# Allegro board TRS80_POWER.brd
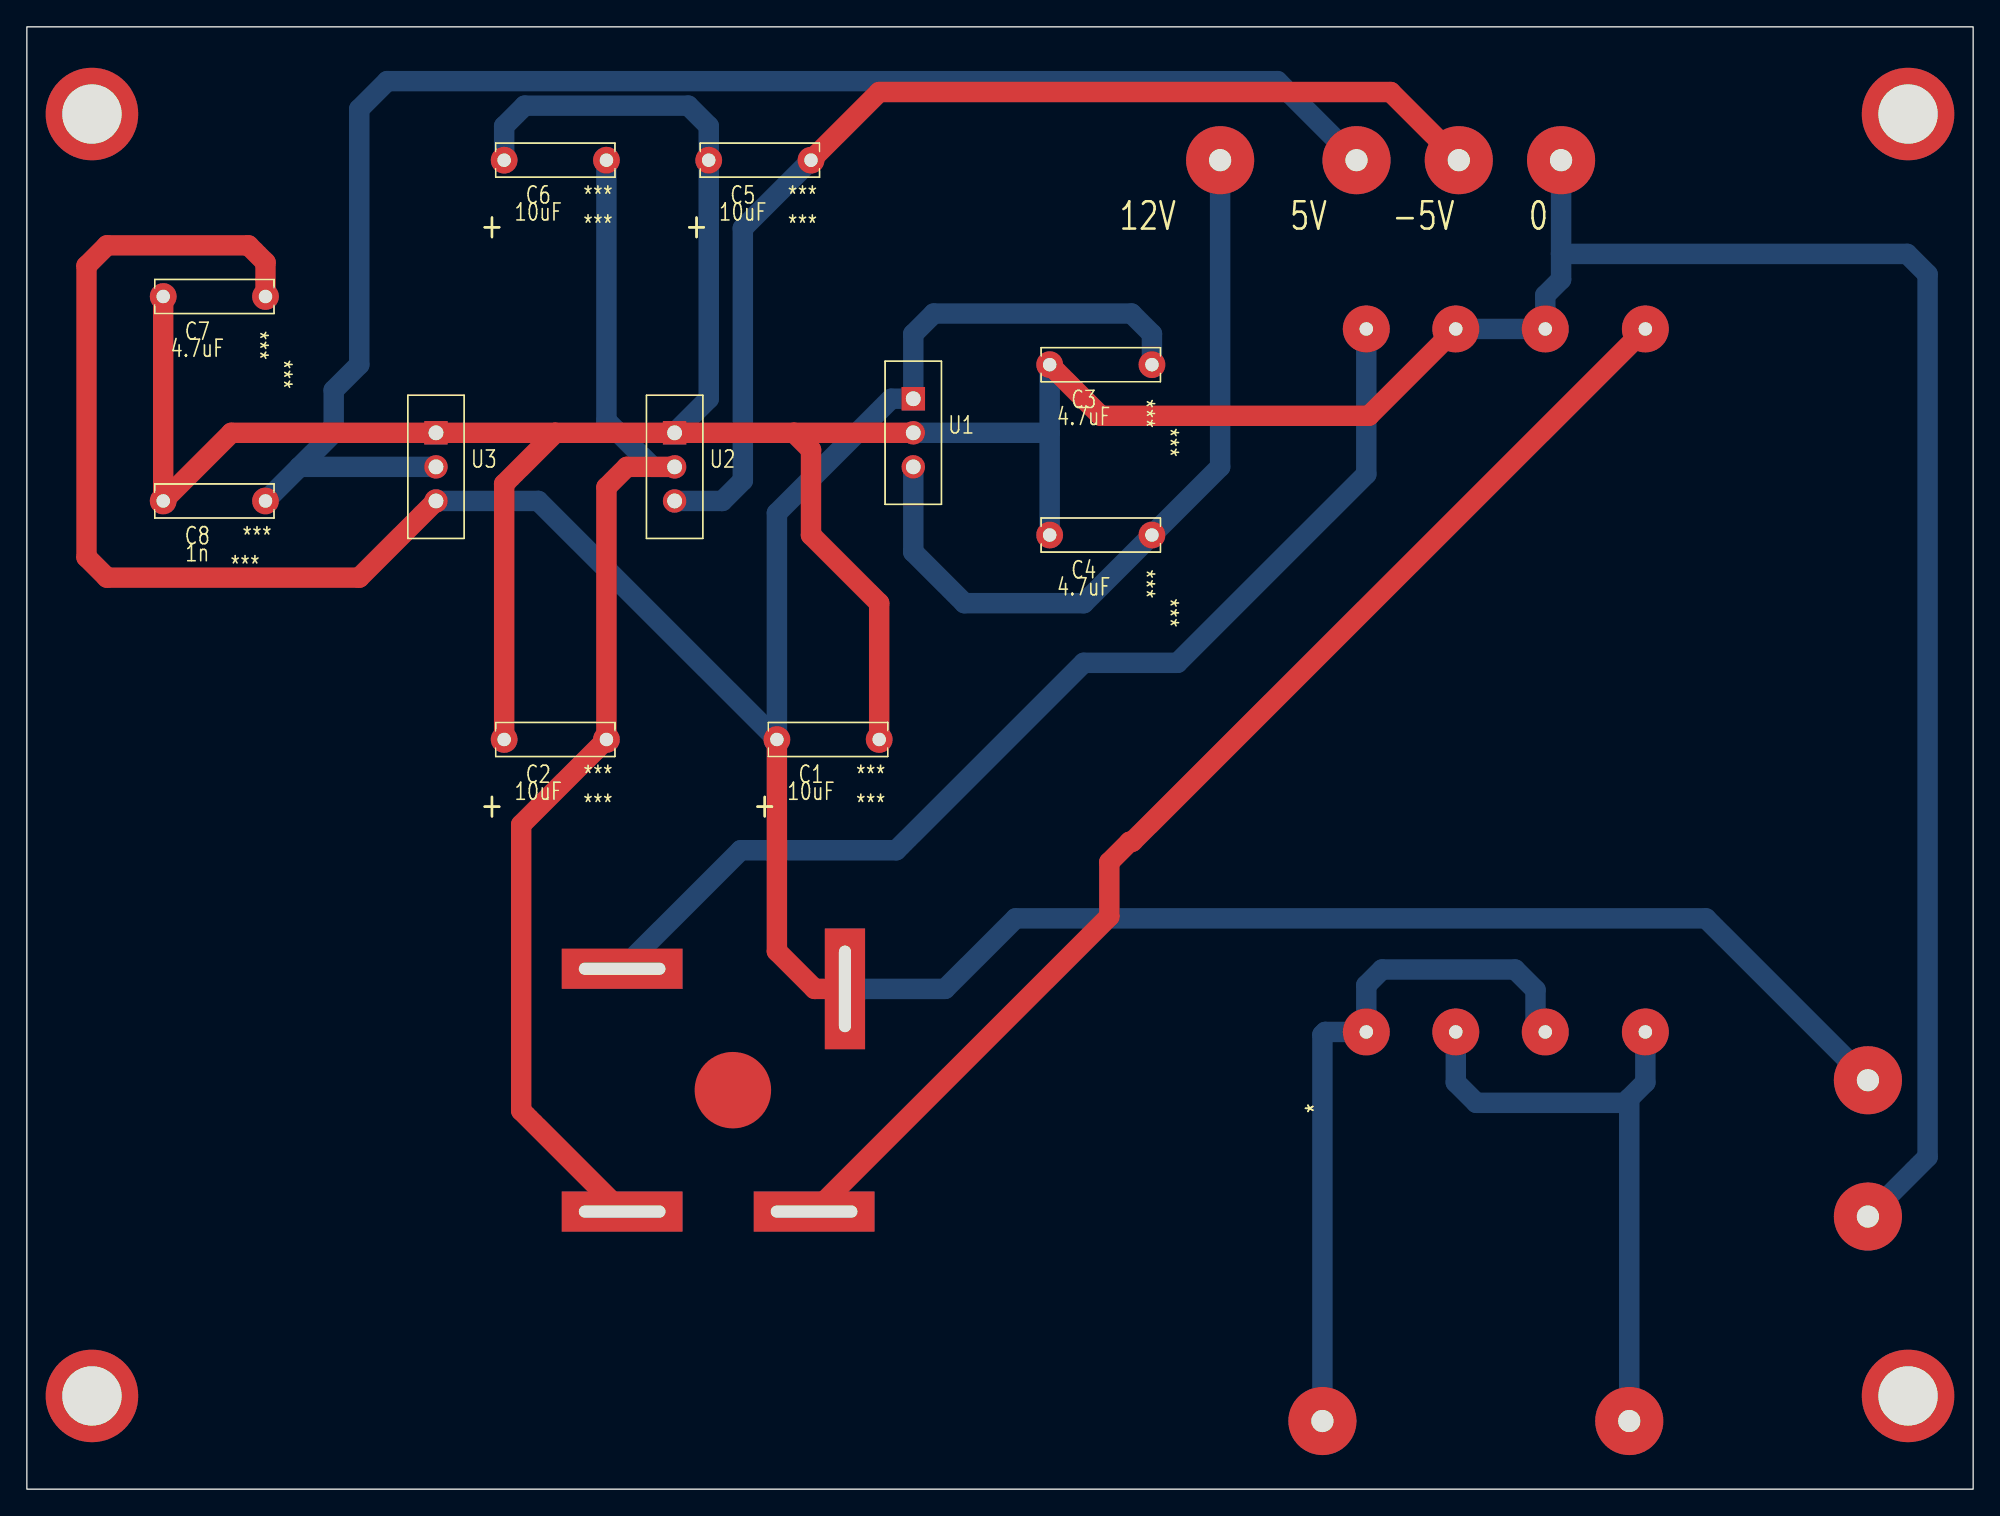
[diagram p0: board, top side]
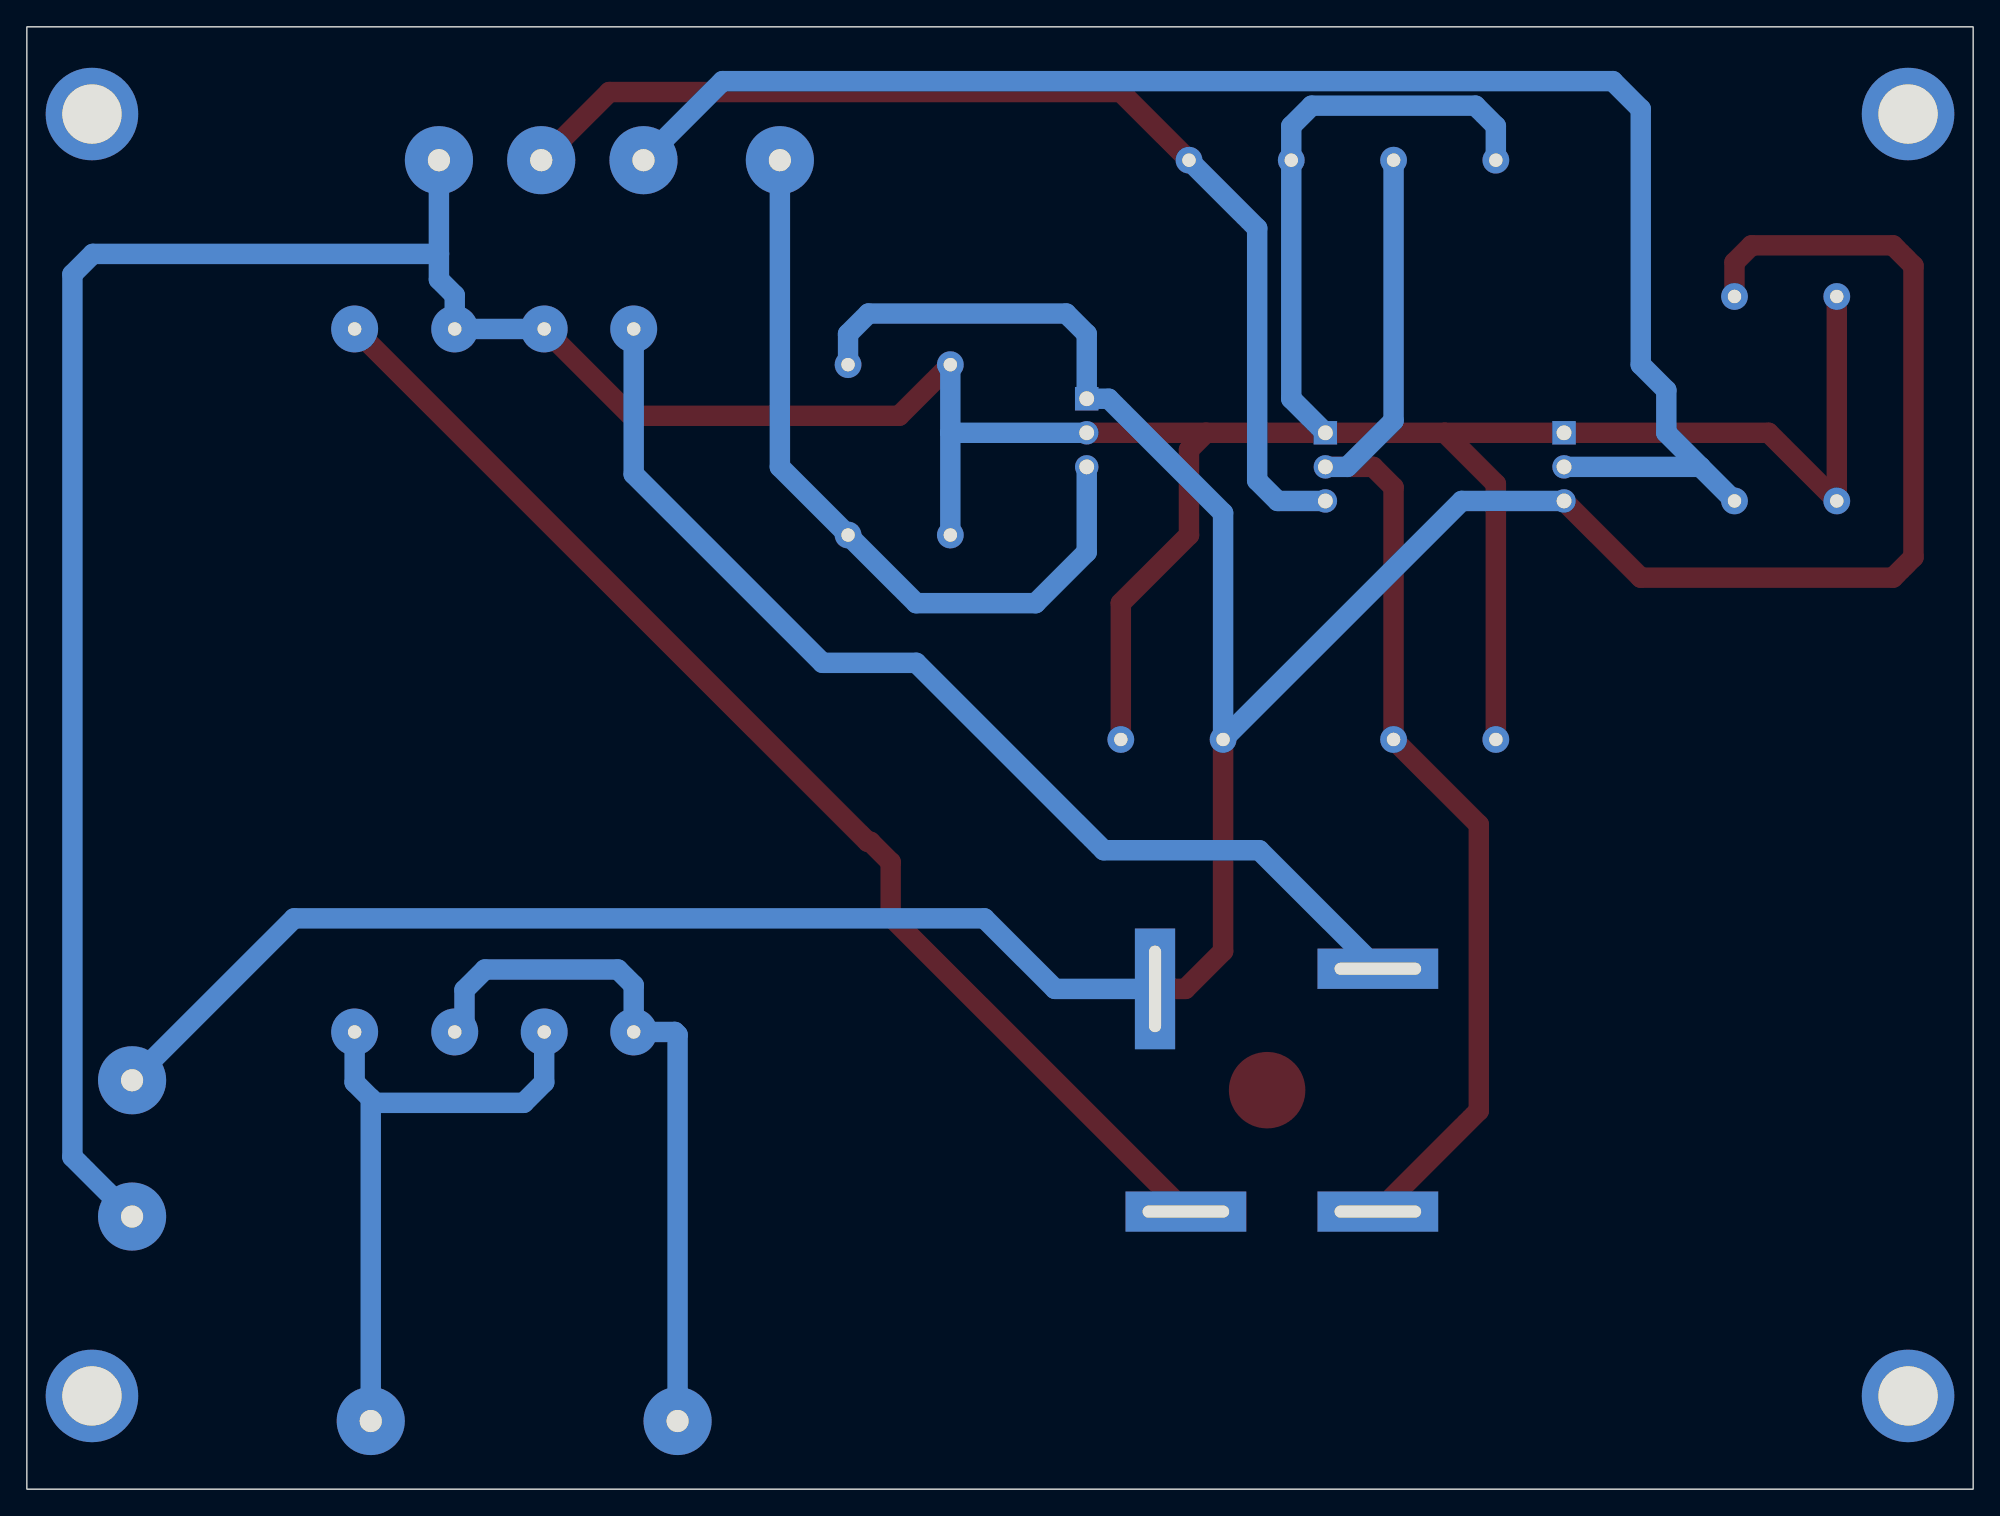
[diagram p1: board, bottom side, seen from below]

Outline 145 x 109 mm; copper layers: TOP, BOTTOM. Coordinates in mm from the lower left corner of the outline.
Outline path: rectangle 0,0 145,109

## Placement (name value [footprint] x y rotation side)
BR1  -  [MB354-BP]  38.1 15.24 0 top
C1  10uF  [POLCAP300]  55.88 55.88 0 top
C2  10uF  [POLCAP300]  35.56 55.88 0 top
C3  4.7uF  [CAP300]  76.2 83.82 0 top
C4  4.7uF  [CAP300]  76.2 71.12 0 top
C5  10uF  [POLCAP300]  50.8 99.06 0 top
C6  10uF  [POLCAP300]  35.56 99.06 0 top
C7  4.7uF  [CAP300]  10.16 88.9 0 top
C8  1n  [CAP300]  10.16 73.66 0 top
J1  CON1  [18AWG_HOLE]  137.16 30.48 0 top
J2  CON1  [18AWG_HOLE]  137.16 20.32 0 top
J3  CON1  [18AWG_HOLE]  119.38 5.08 0 top
J4  CON1  [18AWG_HOLE]  96.52 5.08 0 top
J5  CON1  [18AWG_HOLE]  88.9 99.06 0 top
J6  CON1  [18AWG_HOLE]  99.06 99.06 0 top
J7  CON1  [18AWG_HOLE]  106.68 99.06 0 top
J8  CON1  [18AWG_HOLE]  114.3 99.06 0 top
NOREF  -  [unnamed]  4.85 102.5 0 top
NOREF#2  -  [unnamed]  140.15 102.5 0 top
NOREF#3  -  [unnamed]  140.15 6.95 0 top
NOREF#4  -  [unnamed]  4.85 6.95 0 top
TR1  10:1 24VA Transformer  [DPC-40-600]  132.08 30.48 90 top
U1  lm7812act 12v reg.  [LM7812ACT]  66.04 78.74 0 top
U2  LM7905CT -5V Regulator  [LM7812ACT]  48.26 76.2 0 top
U3  Diodes_AP1117T50L-U  [LM7812ACT]  30.48 76.2 0 top

## Library data of the parts
BR1 = MB354-BP
C1 C2 C5 C6 = C_elect: Tolerance: ***; User Part Number: ***
C3 C4 C7 C8 = C: Tolerance: ***; User Part Number: ***
J1-J8 = CON1
TR1 = dpc-40-600 xfmr 24va
U1 = lm7812act 12v reg.
U2 = LM7905CT -5V Regulator
U3 = Diodes_AP1117T50L-U

## Footprints (pads in the part's own frame, mm; a bottom-side part is the same pattern mirrored in y, then rotated)
18AWG_HOLE
  round 5.08 hole 1.651: 1(0,0)
CAP300
  round 2 hole 1: 1(0,0) 2(7.62,0)
DPC-40-600
  round 3.5 hole 1: 1(3.6,11.5) 2(3.6,18.957) 3(3.6,25.623) 4(3.6,32.29) 5(56,11.5) 6(56,18.957) 7(56,25.623) 8(56,32.29)
LM7812ACT
  rect 1.75x1.75 hole 1.1: 1(0,2.54)
  round 1.75 hole 1.1: 2(0,0) 3(0,-2.54)
MB354-BP
  round 5.7 smd: (14.5,14.5)
  rect 3x9 hole 0.9x6.45: 1(22.85,22.05)
  rect 9x3 hole 6.45x0.9: 2(20.55,5.45) 3(6.25,5.45) 4(6.25,23.55)
POLCAP300
  round 2 hole 1: N(7.62,0) P(0,0)
unnamed
  round 6.9 hole 4.42: (0,0)

## Nets
12V AC: BR1.2(AC1) TR1.5
12V_UNREG: BR1.1(DC+) C1.P(+) C3.2 C7.2 J1.1 U1.1(IN) U3.3(VIN)
120V AC MAINS: J3.1 TR1.1 TR1.3
-12V_UNREG: BR1.3(DC-) C2.N(-) C6.N(-) U2.2(IN)
V5: C8.2 J6.1 U3.2(VOUT)
V12: C4.2 J5.1 U1.3(OUT)
0: C1.N(-) C2.P(+) C3.1 C4.1 C5.P(+) C6.P(+) C7.1 C8.1 J2.1 J8.1 TR1.6 TR1.7 U1.2(GND) U2.1(GND) U3.1(GND)
V-5: C5.N(-) J7.1 U2.3(OUT)
N00330: J4.1 TR1.2 TR1.4
N00450: BR1.4(AC2) TR1.8

## Routing (per net, layer and track width the routed paths; a pad name or vN(x,y) marks a point on that pad's centre or on a via; arc(x,y) is an arc through that point)
12V AC: length 91.6
  TOP w1.524: TR1.5 82.36,48.26 82.17,48.26 80.64,46.74 80.64,42.69 BR1.2
12V_UNREG: length 262.7
  TOP w1.524: C1.P 55.88,40.1 58.69,37.29 BR1.1 ; C7.2 17.78,91.44 16.51,92.71 5.97,92.71 4.45,91.19 4.45,69.47 5.97,67.94 24.77,67.94 U3.3
  BOTTOM w1.524: U3.3 38.1,73.66 C1.P 55.88,72.76 64.4,81.28 U1.1 66.04,86.11 67.56,87.63 82.3,87.63 83.82,86.11 C3.2 ; J1.1 125.09,42.55 73.66,42.55 68.4,37.29 BR1.1
120V AC MAINS: length 46.9
  BOTTOM w1.524: TR1.3 106.46,30.32 107.98,28.8 119.06,28.8 119.38,29.12 ; 119.38,29.12 J3.1 ; 119.38,29.12 120.58,30.32 TR1.1
-12V_UNREG: length 91.4
  TOP w1.524: U2.2 44.7,76.2 43.18,74.68 C2.N 36.83,49.53 36.83,28.21 BR1.3
  BOTTOM w1.524: U2.2 46.62,76.2 43.18,79.64 C6.N
V5: length 119.9
  BOTTOM w1.524: 20.32,76.2 22.86,78.74 22.86,81.92 24.77,83.82 24.77,102.87 26.85,104.95 93.17,104.95 J6.1 ; 20.32,76.2 U3.2 ; 20.32,76.2 C8.2
V12: length 57.9
  BOTTOM w1.524: J5.1 88.9,76.2 C4.2 78.74,66.04 69.85,66.04 66.04,69.85 U1.3
0: length 343.2
  TOP w1.524: 57.15,78.74 58.42,77.47 58.42,71.12 63.5,66.04 C1.N ; 57.15,78.74 U1.2 ; 57.15,78.74 U2.1 39.37,78.74 ; C2.P 35.56,74.93 39.37,78.74 ; C3.1 80.01,80.01 99.99,80.01 TR1.7 ; 39.37,78.74 U3.1 15.24,78.74 C8.1 C7.1
  BOTTOM w1.524: 114.3,92.08 140.08,92.08 141.6,90.55 141.6,24.77 J2.1 ; 114.3,92.08 J8.1 ; 114.3,92.08 114.3,90.17 113.12,88.99 TR1.6 TR1.7 ; 76.2,78.74 C4.1 ; 76.2,78.74 C3.1 ; 76.2,78.74 U1.2 ; C6.P 35.56,101.6 37.08,103.12 49.28,103.12 50.8,101.6 C5.P 50.8,81.28 U2.1
V-5: length 84.2
  TOP w1.524: J7.1 101.6,104.14 63.5,104.14 C5.N
  BOTTOM w1.524: C5.N 53.34,93.98 53.34,75.18 51.82,73.66 U2.3
N00330: length 52.8
  BOTTOM w1.524: TR1.2 112.39,34.81 112.39,37.21 110.87,38.73 100.97,38.73 99.79,37.56 TR1.4 96.73,34.08 96.52,33.87 J4.1
N00450: length 81.5
  BOTTOM w1.524: BR1.4 53.19,47.62 64.77,47.62 78.74,61.59 85.72,61.59 99.79,75.66 TR1.8

## Text on the board
Ref Des/Silkscreen Top: 12V | 5V | -5V | 0
